# EAGLE board Proyecto_ED_P1 (EAGLE 9.7.0)

Size 183.45 x 51.1 mm. Coordinates in mm from the lower left corner, seen from the top.
Outline: 0,0 183.45,0 183.45,51.09 0,51.09 0,0
Copper layers (1*16): Top 0.035mm / dielectric 1.5mm / Bottom 0.035mm
Design rules "default": minimum track width 6mil, minimum drill 0.35mm, track to track 6mil, track to pad 6mil, pad to pad 6mil, via to via 6mil, smd to smd 6mil, copper to edge 40mil, drill to drill 6mil, minimum pad ring 10mil, minimum via ring 8mil, stop-mask expansion 4mil, vias tented up to drill 0mil, thermal gap 10mil

## Footprints (pad centres in the part's own frame; a part is rotated, then mirrored left to right if it is on the bottom)
BATTERY-GENERIC = drill 1.118 pad 3.15 octagon: + 2.54,0; - -2.54,0
LEDRD254W60D565H860B = drill 0.981 pad 1.581: 1 -1.27,0; 2 1.27,0
RESAD1016W63L850D250B = drill 0.83 pad 1.43: 1 -5.08,0; 2 5.08,0
78B04ST = drill 0.8: 1 -3.81,-3.81; 2 -1.27,-3.81; 3 1.27,-3.81; 4 3.81,-3.81; 5 3.81,3.81; 6 1.27,3.81; 7 -1.27,3.81; 8 -3.81,3.81
TO220V = drill 1.016 long: 1 -2.54,-2.54; 2 0,-2.54; 3 2.54,-2.54
DIP762W53P254L1969H508Q14B = drill 0.743 pad 1.343: 1 -3.81,7.62; 2 -3.81,5.08; 3 -3.81,2.54; 4 -3.81,0; 5 -3.81,-2.54; 6 -3.81,-5.08; 7 -3.81,-7.62; 8 3.81,-7.62; 9 3.81,-5.08; 10 3.81,-2.54; 11 3.81,0; 12 3.81,2.54; 13 3.81,5.08; 14 3.81,7.62

## Placement (x,y rotation side)
BAT1  9V  [BATTERY-GENERIC]  8.26,8.26 180 top
D1  RED  [LEDRD254W60D565H860B]  168.13,37.76 180 top
R1  1k  [RESAD1016W63L850D250B]  52.56,27.6 90 top
R2  1k  [RESAD1016W63L850D250B]  55.1,27.6 90 top
R3  1k  [RESAD1016W63L850D250B]  57.64,27.6 90 top
R4  1k  [RESAD1016W63L850D250B]  50.02,27.6 90 top
R5  330  [RESAD1016W63L850D250B]  174.48,37.76 0 top
SW1  SPST-478B04ST  [78B04ST]  53.83,41.57 0 top
U1  LM7805_TO220V  [TO220V]  34.78,37.76 0 top
U2  74HC04_PDIP  [DIP762W53P254L1969H508Q14B]  93.2,41.57 90 top
U3  74HC08_PDIP  [DIP762W53P254L1969H508Q14B]  116.06,41.57 90 top
U4  74HC32_PDIP  [DIP762W53P254L1969H508Q14B]  138.92,41.57 90 top

## Library data of the parts
BAT1 R1-R5 SW1 U1-U4 = Tinkercad
D1 = Tinkercad; CATEGORY: Opto-Electronic; SUB-CATEGORY: LED; VALUE: LED_RED

## Nets
BAT1+: BAT1.+ U1.1
BAT1-: BAT1.- D1.2 R1.1 R2.1 R3.1 R4.1 U1.2 U2.7 U3.7 U4.7
D1_A: D1.1 R5.1
SW1_1: R4.2 SW1.1
U2_1A: R1.2 SW1.2 U2.1 U3.5
U2_1Y: U2.2 U3.1
U2_2A: R3.2 SW1.4 U2.3
U2_VCC: SW1.5 SW1.6 SW1.7 SW1.8 U1.3 U2.14 U3.14 U4.14
U3_1B: U2.4 U3.2
U3_1Y: U3.3 U4.1
U3_2A: R2.2 SW1.3 U3.4
U3_2Y: U3.6 U4.2
U4_1Y: R5.2 U4.3

## Tracks (layer width: path | path; a pad name or v marks a point on that pad's centre or on a via)
BAT1+  (1 unrouted)
BAT1-  (9 unrouted)
D1_A  (1 unrouted)
SW1_1  (1 unrouted)
U2_1A  (3 unrouted)
U2_1Y  (1 unrouted)
U2_2A  (2 unrouted)
U2_VCC  (7 unrouted)
U3_1B  (1 unrouted)
U3_1Y  (1 unrouted)
U3_2A  (2 unrouted)
U3_2Y  (1 unrouted)
U4_1Y  (1 unrouted)